# EAGLE board Breakout Board for USB microB-Panel (EAGLE 6.5.0)
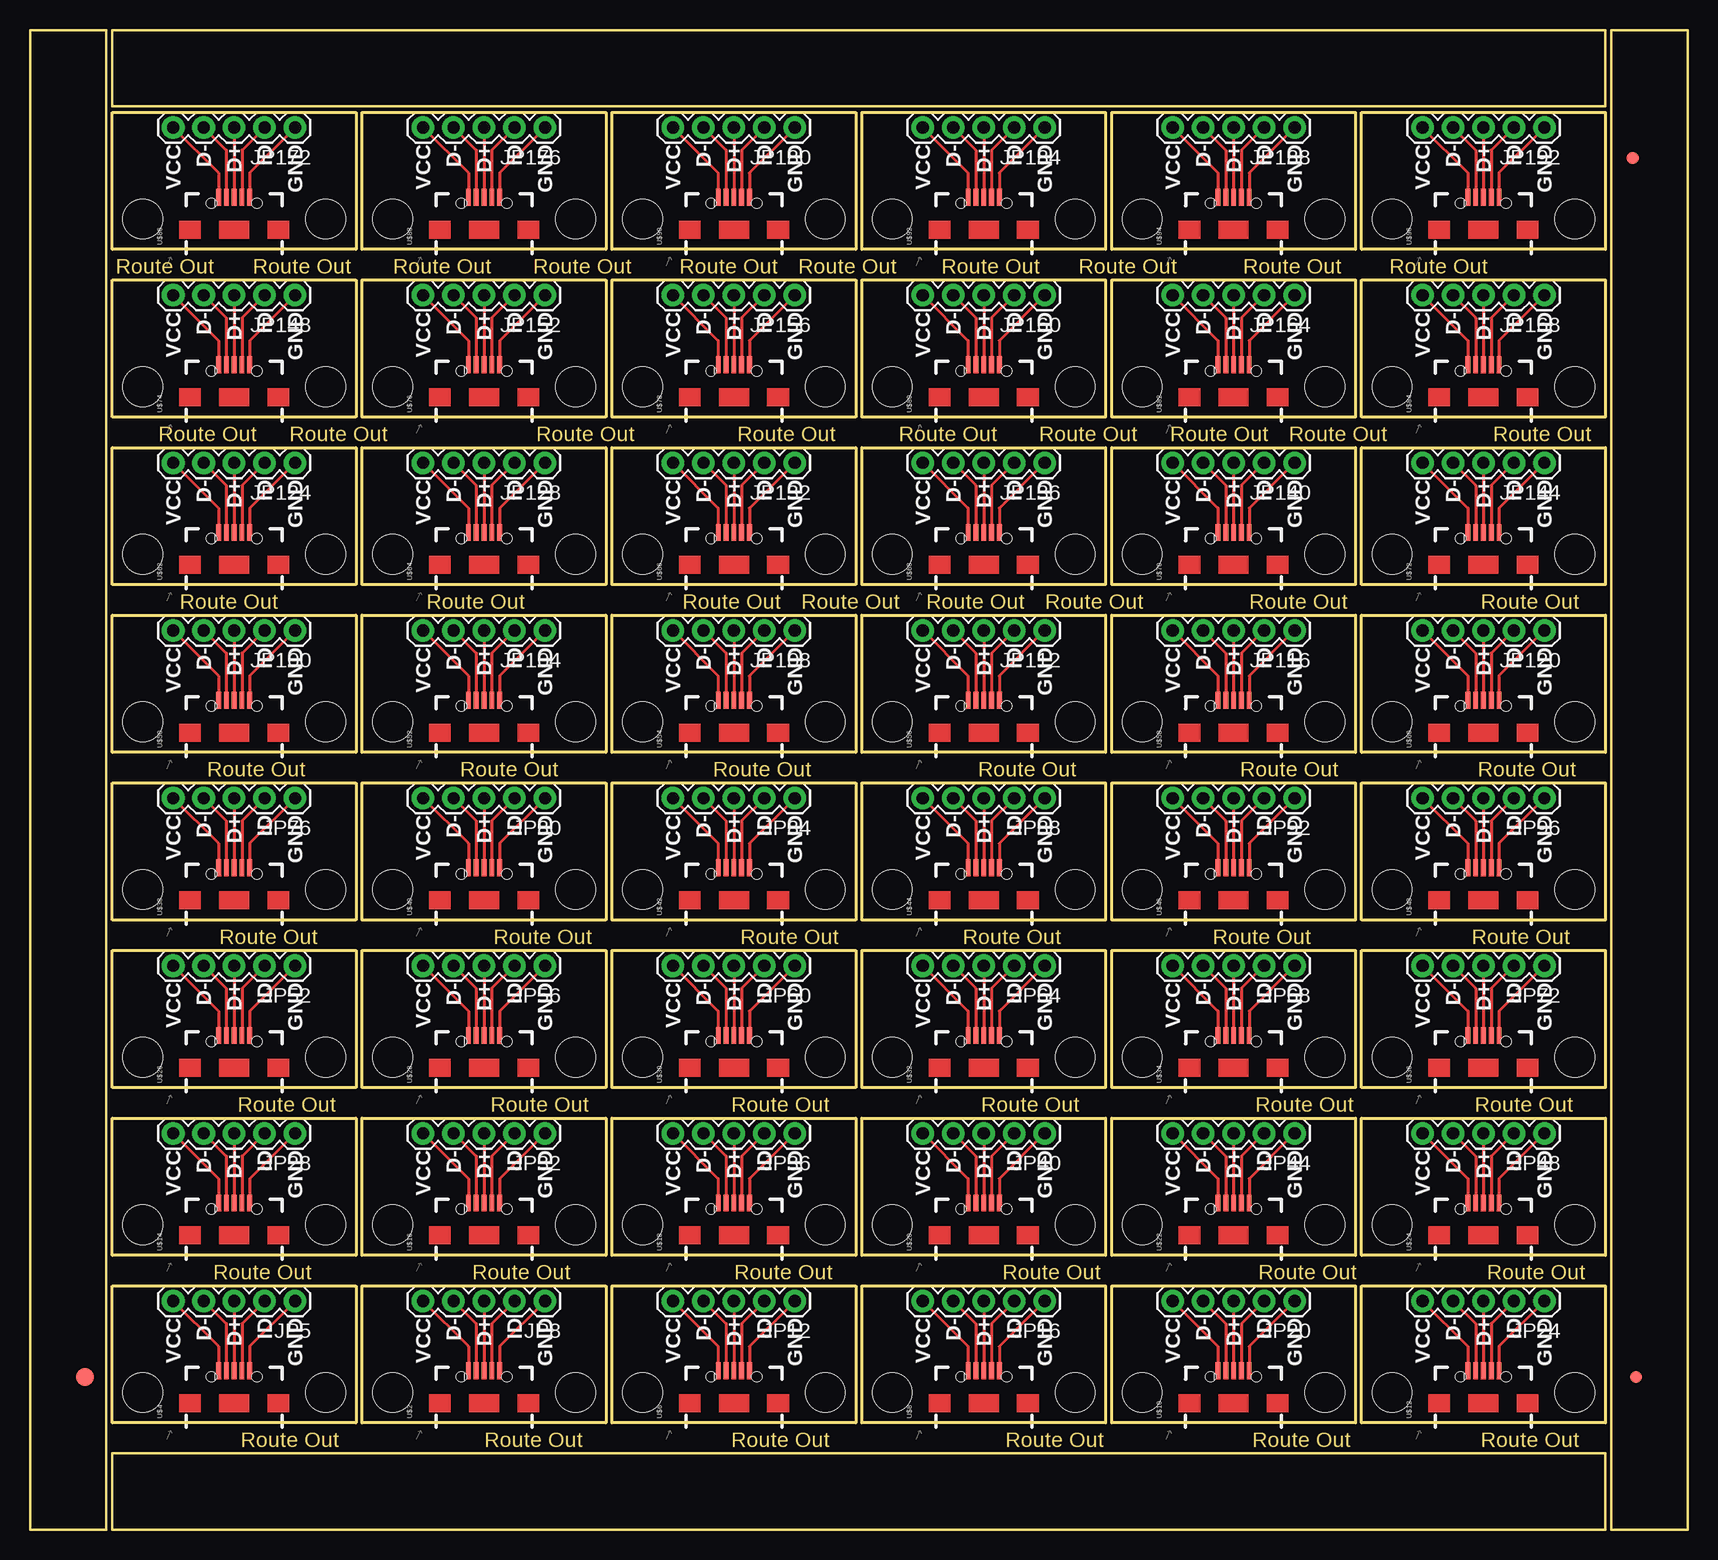
[diagram p0: board, top side]
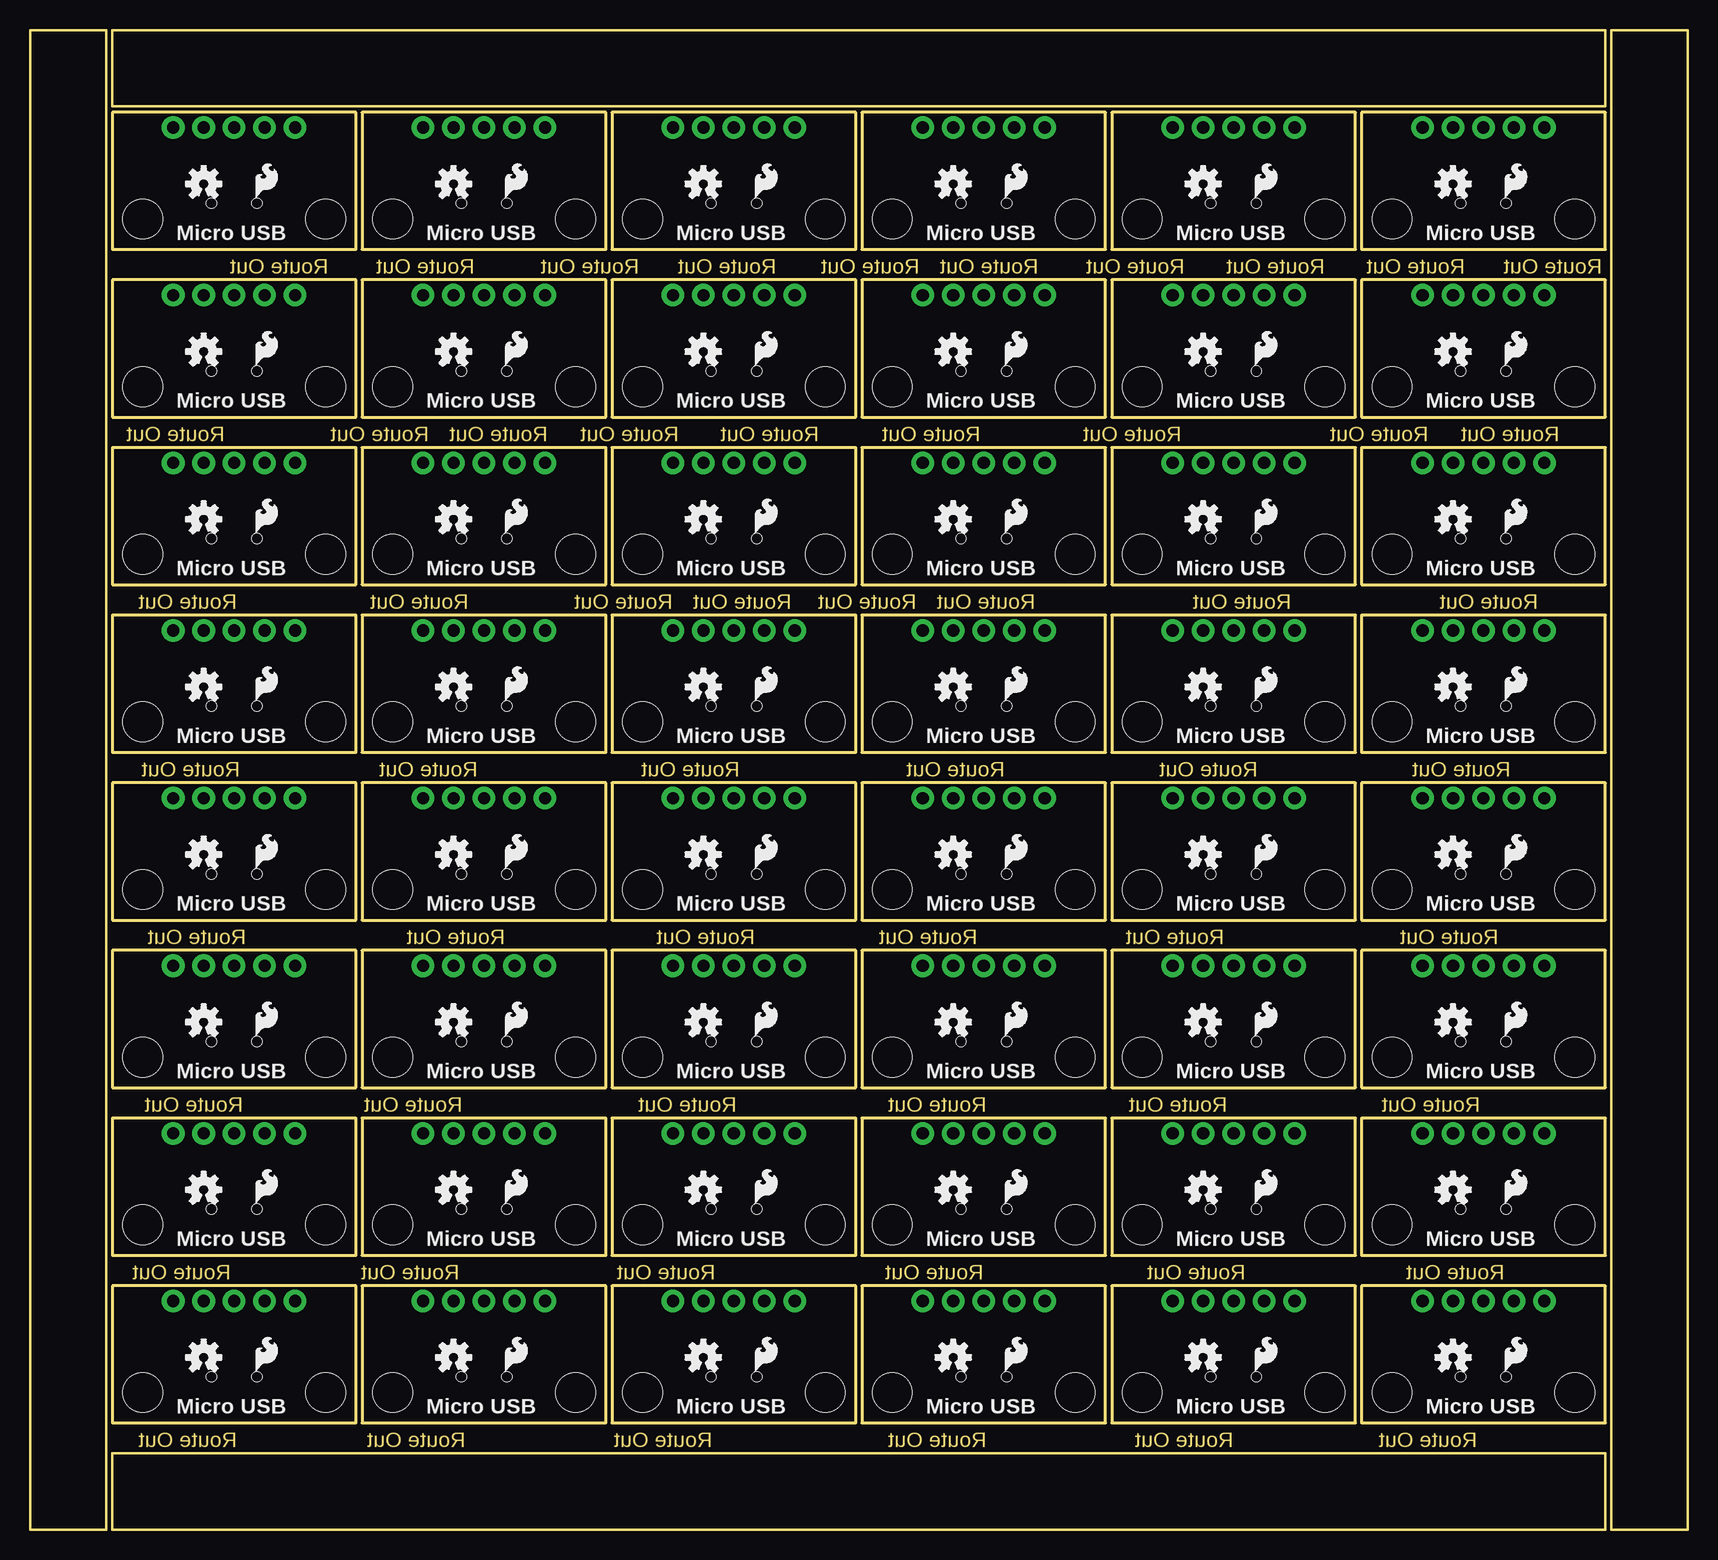
[diagram p1: board, bottom side, seen from below]

Size 138.18 x 124.97 mm. Coordinates in mm from the lower left corner, seen from the top.
Outline: 210 segments
Copper layers (1*16): Top 0.035mm / dielectric 1.5mm / Bottom 0.035mm
Design rules "default": minimum track width 8mil, minimum drill 20mil, track to track 8mil, track to pad 8mil, pad to pad 8mil, via to via 8mil, smd to smd 8mil, copper to edge 9mil, drill to drill 8mil, minimum pad ring 12mil, minimum via ring 10mil, stop-mask expansion 4mil, vias tented up to drill 20mil, thermal gap 10mil

## Footprints (pad centres in the part's own frame; a part is rotated, then mirrored left to right if it is on the bottom)
FIDUCIAL-1.5X3 = smd 1.5 x 1.5: 1 0,0
FIDUCIAL-1X2 = smd 1 x 1: 1 0,0
STAND-OFF = hole 3.302: 0,0
1X05 = drill 1.016 pad 1.88: 1 0,0; 2 2.54,0; 3 5.08,0; 4 7.62,0; 5 10.16,0
USB-AB-MICRO-SMD_V02_BOSS = smd 1.4 x 0.4: D+1 2.7,0; D-1 2.7,0.65; GND1 2.7,-1.3; ID1 2.7,-0.65; VBUS1 2.7,1.3 | hole 0.85: 2.2,1.9; 2.2,-1.9

## Placement (x,y rotation side)
E$1  [FIDUCIAL-1.5X3]  4.57,12.7 0 top
E$4  [FIDUCIAL-1X2]  133.86,12.7 0 top
E$5  [FIDUCIAL-1X2]  133.6,114.3 180 top
JP1  LOGO-SFESK  [SFE-LOGO-FLAME]  36.07,13.21 0 bottom
JP2  LOGO-SFESK  [SFE-LOGO-FLAME]  15.24,13.21 0 bottom
JP3  STAND-OFF  [STAND-OFF]  24.64,11.43 0 top
JP4  STAND-OFF  [STAND-OFF]  9.4,11.43 0 top
JP5  [1X05]  22.1,19.05 180 top
JP6  STAND-OFF  [STAND-OFF]  45.47,11.43 0 top
JP7  STAND-OFF  [STAND-OFF]  30.23,11.43 0 top
JP8  [1X05]  42.93,19.05 180 top
JP9  LOGO-SFESK  [SFE-LOGO-FLAME]  56.9,13.21 0 bottom
JP10  STAND-OFF  [STAND-OFF]  66.29,11.43 0 top
JP11  STAND-OFF  [STAND-OFF]  51.05,11.43 0 top
JP12  [1X05]  63.75,19.05 180 top
JP13  LOGO-SFESK  [SFE-LOGO-FLAME]  77.72,13.21 0 bottom
JP14  STAND-OFF  [STAND-OFF]  87.12,11.43 0 top
JP15  STAND-OFF  [STAND-OFF]  71.88,11.43 0 top
JP16  [1X05]  84.58,19.05 180 top
JP17  LOGO-SFESK  [SFE-LOGO-FLAME]  98.55,13.21 0 bottom
JP18  STAND-OFF  [STAND-OFF]  107.95,11.43 0 top
JP19  STAND-OFF  [STAND-OFF]  92.71,11.43 0 top
JP20  [1X05]  105.41,19.05 180 top
JP21  LOGO-SFESK  [SFE-LOGO-FLAME]  119.38,13.21 0 bottom
JP22  STAND-OFF  [STAND-OFF]  128.78,11.43 0 top
JP23  STAND-OFF  [STAND-OFF]  113.54,11.43 0 top
JP24  [1X05]  126.24,19.05 180 top
JP25  LOGO-SFESK  [SFE-LOGO-FLAME]  15.24,27.18 0 bottom
JP26  STAND-OFF  [STAND-OFF]  24.64,25.4 0 top
JP27  STAND-OFF  [STAND-OFF]  9.4,25.4 0 top
JP28  [1X05]  22.1,33.02 180 top
JP29  LOGO-SFESK  [SFE-LOGO-FLAME]  36.07,27.18 0 bottom
JP30  STAND-OFF  [STAND-OFF]  45.47,25.4 0 top
JP31  STAND-OFF  [STAND-OFF]  30.23,25.4 0 top
JP32  [1X05]  42.93,33.02 180 top
JP33  LOGO-SFESK  [SFE-LOGO-FLAME]  56.9,27.18 0 bottom
JP34  STAND-OFF  [STAND-OFF]  66.29,25.4 0 top
JP35  STAND-OFF  [STAND-OFF]  51.05,25.4 0 top
JP36  [1X05]  63.75,33.02 180 top
JP37  LOGO-SFESK  [SFE-LOGO-FLAME]  77.72,27.18 0 bottom
JP38  STAND-OFF  [STAND-OFF]  87.12,25.4 0 top
JP39  STAND-OFF  [STAND-OFF]  71.88,25.4 0 top
JP40  [1X05]  84.58,33.02 180 top
JP41  LOGO-SFESK  [SFE-LOGO-FLAME]  98.55,27.18 0 bottom
JP42  STAND-OFF  [STAND-OFF]  107.95,25.4 0 top
JP43  STAND-OFF  [STAND-OFF]  92.71,25.4 0 top
JP44  [1X05]  105.41,33.02 180 top
JP45  LOGO-SFESK  [SFE-LOGO-FLAME]  119.38,27.18 0 bottom
JP46  STAND-OFF  [STAND-OFF]  128.78,25.4 0 top
JP47  STAND-OFF  [STAND-OFF]  113.54,25.4 0 top
JP48  [1X05]  126.24,33.02 180 top
JP49  LOGO-SFESK  [SFE-LOGO-FLAME]  15.24,41.15 0 bottom
JP50  STAND-OFF  [STAND-OFF]  24.64,39.37 0 top
JP51  STAND-OFF  [STAND-OFF]  9.4,39.37 0 top
JP52  [1X05]  22.1,46.99 180 top
JP53  LOGO-SFESK  [SFE-LOGO-FLAME]  36.07,41.15 0 bottom
JP54  STAND-OFF  [STAND-OFF]  45.47,39.37 0 top
JP55  STAND-OFF  [STAND-OFF]  30.23,39.37 0 top
JP56  [1X05]  42.93,46.99 180 top
JP57  LOGO-SFESK  [SFE-LOGO-FLAME]  56.9,41.15 0 bottom
JP58  STAND-OFF  [STAND-OFF]  66.29,39.37 0 top
JP59  STAND-OFF  [STAND-OFF]  51.05,39.37 0 top
JP60  [1X05]  63.75,46.99 180 top
JP61  LOGO-SFESK  [SFE-LOGO-FLAME]  77.72,41.15 0 bottom
JP62  STAND-OFF  [STAND-OFF]  87.12,39.37 0 top
JP63  STAND-OFF  [STAND-OFF]  71.88,39.37 0 top
JP64  [1X05]  84.58,46.99 180 top
JP65  LOGO-SFESK  [SFE-LOGO-FLAME]  98.55,41.15 0 bottom
JP66  STAND-OFF  [STAND-OFF]  107.95,39.37 0 top
JP67  STAND-OFF  [STAND-OFF]  92.71,39.37 0 top
JP68  [1X05]  105.41,46.99 180 top
JP69  LOGO-SFESK  [SFE-LOGO-FLAME]  119.38,41.15 0 bottom
JP70  STAND-OFF  [STAND-OFF]  128.78,39.37 0 top
JP71  STAND-OFF  [STAND-OFF]  113.54,39.37 0 top
JP72  [1X05]  126.24,46.99 180 top
JP73  LOGO-SFESK  [SFE-LOGO-FLAME]  15.24,55.12 0 bottom
JP74  STAND-OFF  [STAND-OFF]  24.64,53.34 0 top
JP75  STAND-OFF  [STAND-OFF]  9.4,53.34 0 top
JP76  [1X05]  22.1,60.96 180 top
JP77  LOGO-SFESK  [SFE-LOGO-FLAME]  36.07,55.12 0 bottom
JP78  STAND-OFF  [STAND-OFF]  45.47,53.34 0 top
JP79  STAND-OFF  [STAND-OFF]  30.23,53.34 0 top
JP80  [1X05]  42.93,60.96 180 top
JP81  LOGO-SFESK  [SFE-LOGO-FLAME]  56.9,55.12 0 bottom
JP82  STAND-OFF  [STAND-OFF]  66.29,53.34 0 top
JP83  STAND-OFF  [STAND-OFF]  51.05,53.34 0 top
JP84  [1X05]  63.75,60.96 180 top
JP85  LOGO-SFESK  [SFE-LOGO-FLAME]  77.72,55.12 0 bottom
JP86  STAND-OFF  [STAND-OFF]  87.12,53.34 0 top
JP87  STAND-OFF  [STAND-OFF]  71.88,53.34 0 top
JP88  [1X05]  84.58,60.96 180 top
JP89  LOGO-SFESK  [SFE-LOGO-FLAME]  98.55,55.12 0 bottom
JP90  STAND-OFF  [STAND-OFF]  107.95,53.34 0 top
JP91  STAND-OFF  [STAND-OFF]  92.71,53.34 0 top
JP92  [1X05]  105.41,60.96 180 top
JP93  LOGO-SFESK  [SFE-LOGO-FLAME]  119.38,55.12 0 bottom
JP94  STAND-OFF  [STAND-OFF]  128.78,53.34 0 top
JP95  STAND-OFF  [STAND-OFF]  113.54,53.34 0 top
JP96  [1X05]  126.24,60.96 180 top
JP97  LOGO-SFESK  [SFE-LOGO-FLAME]  15.24,69.09 0 bottom
JP98  STAND-OFF  [STAND-OFF]  24.64,67.31 0 top
JP99  STAND-OFF  [STAND-OFF]  9.4,67.31 0 top
JP100  [1X05]  22.1,74.93 180 top
JP101  LOGO-SFESK  [SFE-LOGO-FLAME]  36.07,69.09 0 bottom
JP102  STAND-OFF  [STAND-OFF]  45.47,67.31 0 top
JP103  STAND-OFF  [STAND-OFF]  30.23,67.31 0 top
JP104  [1X05]  42.93,74.93 180 top
JP105  LOGO-SFESK  [SFE-LOGO-FLAME]  56.9,69.09 0 bottom
JP106  STAND-OFF  [STAND-OFF]  66.29,67.31 0 top
JP107  STAND-OFF  [STAND-OFF]  51.05,67.31 0 top
JP108  [1X05]  63.75,74.93 180 top
JP109  LOGO-SFESK  [SFE-LOGO-FLAME]  77.72,69.09 0 bottom
JP110  STAND-OFF  [STAND-OFF]  87.12,67.31 0 top
JP111  STAND-OFF  [STAND-OFF]  71.88,67.31 0 top
JP112  [1X05]  84.58,74.93 180 top
JP113  LOGO-SFESK  [SFE-LOGO-FLAME]  98.55,69.09 0 bottom
JP114  STAND-OFF  [STAND-OFF]  107.95,67.31 0 top
JP115  STAND-OFF  [STAND-OFF]  92.71,67.31 0 top
JP116  [1X05]  105.41,74.93 180 top
JP117  LOGO-SFESK  [SFE-LOGO-FLAME]  119.38,69.09 0 bottom
JP118  STAND-OFF  [STAND-OFF]  128.78,67.31 0 top
JP119  STAND-OFF  [STAND-OFF]  113.54,67.31 0 top
JP120  [1X05]  126.24,74.93 180 top
JP121  LOGO-SFESK  [SFE-LOGO-FLAME]  15.24,83.06 0 bottom
JP122  STAND-OFF  [STAND-OFF]  24.64,81.28 0 top
JP123  STAND-OFF  [STAND-OFF]  9.4,81.28 0 top
JP124  [1X05]  22.1,88.9 180 top
JP125  LOGO-SFESK  [SFE-LOGO-FLAME]  36.07,83.06 0 bottom
JP126  STAND-OFF  [STAND-OFF]  45.47,81.28 0 top
JP127  STAND-OFF  [STAND-OFF]  30.23,81.28 0 top
JP128  [1X05]  42.93,88.9 180 top
JP129  LOGO-SFESK  [SFE-LOGO-FLAME]  56.9,83.06 0 bottom
JP130  STAND-OFF  [STAND-OFF]  66.29,81.28 0 top
JP131  STAND-OFF  [STAND-OFF]  51.05,81.28 0 top
JP132  [1X05]  63.75,88.9 180 top
JP133  LOGO-SFESK  [SFE-LOGO-FLAME]  77.72,83.06 0 bottom
JP134  STAND-OFF  [STAND-OFF]  87.12,81.28 0 top
JP135  STAND-OFF  [STAND-OFF]  71.88,81.28 0 top
JP136  [1X05]  84.58,88.9 180 top
JP137  LOGO-SFESK  [SFE-LOGO-FLAME]  98.55,83.06 0 bottom
JP138  STAND-OFF  [STAND-OFF]  107.95,81.28 0 top
JP139  STAND-OFF  [STAND-OFF]  92.71,81.28 0 top
JP140  [1X05]  105.41,88.9 180 top
JP141  LOGO-SFESK  [SFE-LOGO-FLAME]  119.38,83.06 0 bottom
JP142  STAND-OFF  [STAND-OFF]  128.78,81.28 0 top
JP143  STAND-OFF  [STAND-OFF]  113.54,81.28 0 top
JP144  [1X05]  126.24,88.9 180 top
JP145  LOGO-SFESK  [SFE-LOGO-FLAME]  15.24,97.03 0 bottom
JP146  STAND-OFF  [STAND-OFF]  24.64,95.25 0 top
JP147  STAND-OFF  [STAND-OFF]  9.4,95.25 0 top
JP148  [1X05]  22.1,102.87 180 top
JP149  LOGO-SFESK  [SFE-LOGO-FLAME]  36.07,97.03 0 bottom
JP150  STAND-OFF  [STAND-OFF]  45.47,95.25 0 top
JP151  STAND-OFF  [STAND-OFF]  30.23,95.25 0 top
JP152  [1X05]  42.93,102.87 180 top
JP153  LOGO-SFESK  [SFE-LOGO-FLAME]  56.9,97.03 0 bottom
JP154  STAND-OFF  [STAND-OFF]  66.29,95.25 0 top
JP155  STAND-OFF  [STAND-OFF]  51.05,95.25 0 top
JP156  [1X05]  63.75,102.87 180 top
JP157  LOGO-SFESK  [SFE-LOGO-FLAME]  77.72,97.03 0 bottom
JP158  STAND-OFF  [STAND-OFF]  87.12,95.25 0 top
JP159  STAND-OFF  [STAND-OFF]  71.88,95.25 0 top
JP160  [1X05]  84.58,102.87 180 top
JP161  LOGO-SFESK  [SFE-LOGO-FLAME]  98.55,97.03 0 bottom
JP162  STAND-OFF  [STAND-OFF]  107.95,95.25 0 top
JP163  STAND-OFF  [STAND-OFF]  92.71,95.25 0 top
JP164  [1X05]  105.41,102.87 180 top
JP165  LOGO-SFESK  [SFE-LOGO-FLAME]  119.38,97.03 0 bottom
JP166  STAND-OFF  [STAND-OFF]  128.78,95.25 0 top
JP167  STAND-OFF  [STAND-OFF]  113.54,95.25 0 top
JP168  [1X05]  126.24,102.87 180 top
JP169  LOGO-SFESK  [SFE-LOGO-FLAME]  15.24,111 0 bottom
JP170  STAND-OFF  [STAND-OFF]  24.64,109.22 0 top
JP171  STAND-OFF  [STAND-OFF]  9.4,109.22 0 top
JP172  [1X05]  22.1,116.84 180 top
JP173  LOGO-SFESK  [SFE-LOGO-FLAME]  36.07,111 0 bottom
JP174  STAND-OFF  [STAND-OFF]  45.47,109.22 0 top
JP175  STAND-OFF  [STAND-OFF]  30.23,109.22 0 top
JP176  [1X05]  42.93,116.84 180 top
JP177  LOGO-SFESK  [SFE-LOGO-FLAME]  56.9,111 0 bottom
JP178  STAND-OFF  [STAND-OFF]  66.29,109.22 0 top
JP179  STAND-OFF  [STAND-OFF]  51.05,109.22 0 top
JP180  [1X05]  63.75,116.84 180 top
JP181  LOGO-SFESK  [SFE-LOGO-FLAME]  77.72,111 0 bottom
JP182  STAND-OFF  [STAND-OFF]  87.12,109.22 0 top
JP183  STAND-OFF  [STAND-OFF]  71.88,109.22 0 top
JP184  [1X05]  84.58,116.84 180 top
JP185  LOGO-SFESK  [SFE-LOGO-FLAME]  98.55,111 0 bottom
JP186  STAND-OFF  [STAND-OFF]  107.95,109.22 0 top
JP187  STAND-OFF  [STAND-OFF]  92.71,109.22 0 top
JP188  [1X05]  105.41,116.84 180 top
JP189  LOGO-SFESK  [SFE-LOGO-FLAME]  119.38,111 0 bottom
JP190  STAND-OFF  [STAND-OFF]  128.78,109.22 0 top
JP191  STAND-OFF  [STAND-OFF]  113.54,109.22 0 top
JP192  [1X05]  126.24,116.84 180 top
U$1  OSHW-LOGOS  [OSHW-LOGO-S]  40.39,14.35 0 bottom
U$2  [USB-AB-MICRO-SMD_V02_BOSS]  37.85,10.54 90 top
U$3  OSHW-LOGOS  [OSHW-LOGO-S]  19.56,14.35 0 bottom
U$4  [USB-AB-MICRO-SMD_V02_BOSS]  17.02,10.54 90 top
U$5  OSHW-LOGOS  [OSHW-LOGO-S]  61.21,14.35 0 bottom
U$6  [USB-AB-MICRO-SMD_V02_BOSS]  58.67,10.54 90 top
U$7  OSHW-LOGOS  [OSHW-LOGO-S]  82.04,14.35 0 bottom
U$8  [USB-AB-MICRO-SMD_V02_BOSS]  79.5,10.54 90 top
U$9  OSHW-LOGOS  [OSHW-LOGO-S]  102.87,14.35 0 bottom
U$10  [USB-AB-MICRO-SMD_V02_BOSS]  100.33,10.54 90 top
U$11  OSHW-LOGOS  [OSHW-LOGO-S]  123.7,14.35 0 bottom
U$12  [USB-AB-MICRO-SMD_V02_BOSS]  121.16,10.54 90 top
U$13  OSHW-LOGOS  [OSHW-LOGO-S]  19.56,28.32 0 bottom
U$14  [USB-AB-MICRO-SMD_V02_BOSS]  17.02,24.51 90 top
U$15  OSHW-LOGOS  [OSHW-LOGO-S]  40.39,28.32 0 bottom
U$16  [USB-AB-MICRO-SMD_V02_BOSS]  37.85,24.51 90 top
U$17  OSHW-LOGOS  [OSHW-LOGO-S]  61.21,28.32 0 bottom
U$18  [USB-AB-MICRO-SMD_V02_BOSS]  58.67,24.51 90 top
U$19  OSHW-LOGOS  [OSHW-LOGO-S]  82.04,28.32 0 bottom
U$20  [USB-AB-MICRO-SMD_V02_BOSS]  79.5,24.51 90 top
U$21  OSHW-LOGOS  [OSHW-LOGO-S]  102.87,28.32 0 bottom
U$22  [USB-AB-MICRO-SMD_V02_BOSS]  100.33,24.51 90 top
U$23  OSHW-LOGOS  [OSHW-LOGO-S]  123.7,28.32 0 bottom
U$24  [USB-AB-MICRO-SMD_V02_BOSS]  121.16,24.51 90 top
U$25  OSHW-LOGOS  [OSHW-LOGO-S]  19.56,42.29 0 bottom
U$26  [USB-AB-MICRO-SMD_V02_BOSS]  17.02,38.48 90 top
U$27  OSHW-LOGOS  [OSHW-LOGO-S]  40.39,42.29 0 bottom
U$28  [USB-AB-MICRO-SMD_V02_BOSS]  37.85,38.48 90 top
U$29  OSHW-LOGOS  [OSHW-LOGO-S]  61.21,42.29 0 bottom
U$30  [USB-AB-MICRO-SMD_V02_BOSS]  58.67,38.48 90 top
U$31  OSHW-LOGOS  [OSHW-LOGO-S]  82.04,42.29 0 bottom
U$32  [USB-AB-MICRO-SMD_V02_BOSS]  79.5,38.48 90 top
U$33  OSHW-LOGOS  [OSHW-LOGO-S]  102.87,42.29 0 bottom
U$34  [USB-AB-MICRO-SMD_V02_BOSS]  100.33,38.48 90 top
U$35  OSHW-LOGOS  [OSHW-LOGO-S]  123.7,42.29 0 bottom
U$36  [USB-AB-MICRO-SMD_V02_BOSS]  121.16,38.48 90 top
U$37  OSHW-LOGOS  [OSHW-LOGO-S]  19.56,56.26 0 bottom
U$38  [USB-AB-MICRO-SMD_V02_BOSS]  17.02,52.45 90 top
U$39  OSHW-LOGOS  [OSHW-LOGO-S]  40.39,56.26 0 bottom
U$40  [USB-AB-MICRO-SMD_V02_BOSS]  37.85,52.45 90 top
U$41  OSHW-LOGOS  [OSHW-LOGO-S]  61.21,56.26 0 bottom
U$42  [USB-AB-MICRO-SMD_V02_BOSS]  58.67,52.45 90 top
U$43  OSHW-LOGOS  [OSHW-LOGO-S]  82.04,56.26 0 bottom
U$44  [USB-AB-MICRO-SMD_V02_BOSS]  79.5,52.45 90 top
U$45  OSHW-LOGOS  [OSHW-LOGO-S]  102.87,56.26 0 bottom
U$46  [USB-AB-MICRO-SMD_V02_BOSS]  100.33,52.45 90 top
U$47  OSHW-LOGOS  [OSHW-LOGO-S]  123.7,56.26 0 bottom
U$48  [USB-AB-MICRO-SMD_V02_BOSS]  121.16,52.45 90 top
U$49  OSHW-LOGOS  [OSHW-LOGO-S]  19.56,70.23 0 bottom
U$50  [USB-AB-MICRO-SMD_V02_BOSS]  17.02,66.42 90 top
U$51  OSHW-LOGOS  [OSHW-LOGO-S]  40.39,70.23 0 bottom
U$52  [USB-AB-MICRO-SMD_V02_BOSS]  37.85,66.42 90 top
U$53  OSHW-LOGOS  [OSHW-LOGO-S]  61.21,70.23 0 bottom
U$54  [USB-AB-MICRO-SMD_V02_BOSS]  58.67,66.42 90 top
U$55  OSHW-LOGOS  [OSHW-LOGO-S]  82.04,70.23 0 bottom
U$56  [USB-AB-MICRO-SMD_V02_BOSS]  79.5,66.42 90 top
U$57  OSHW-LOGOS  [OSHW-LOGO-S]  102.87,70.23 0 bottom
U$58  [USB-AB-MICRO-SMD_V02_BOSS]  100.33,66.42 90 top
U$59  OSHW-LOGOS  [OSHW-LOGO-S]  123.7,70.23 0 bottom
U$60  [USB-AB-MICRO-SMD_V02_BOSS]  121.16,66.42 90 top
U$61  OSHW-LOGOS  [OSHW-LOGO-S]  19.56,84.2 0 bottom
U$62  [USB-AB-MICRO-SMD_V02_BOSS]  17.02,80.39 90 top
U$63  OSHW-LOGOS  [OSHW-LOGO-S]  40.39,84.2 0 bottom
U$64  [USB-AB-MICRO-SMD_V02_BOSS]  37.85,80.39 90 top
U$65  OSHW-LOGOS  [OSHW-LOGO-S]  61.21,84.2 0 bottom
U$66  [USB-AB-MICRO-SMD_V02_BOSS]  58.67,80.39 90 top
U$67  OSHW-LOGOS  [OSHW-LOGO-S]  82.04,84.2 0 bottom
U$68  [USB-AB-MICRO-SMD_V02_BOSS]  79.5,80.39 90 top
U$69  OSHW-LOGOS  [OSHW-LOGO-S]  102.87,84.2 0 bottom
U$70  [USB-AB-MICRO-SMD_V02_BOSS]  100.33,80.39 90 top
U$71  OSHW-LOGOS  [OSHW-LOGO-S]  123.7,84.2 0 bottom
U$72  [USB-AB-MICRO-SMD_V02_BOSS]  121.16,80.39 90 top
U$73  OSHW-LOGOS  [OSHW-LOGO-S]  19.56,98.17 0 bottom
U$74  [USB-AB-MICRO-SMD_V02_BOSS]  17.02,94.36 90 top
U$75  OSHW-LOGOS  [OSHW-LOGO-S]  40.39,98.17 0 bottom
U$76  [USB-AB-MICRO-SMD_V02_BOSS]  37.85,94.36 90 top
U$77  OSHW-LOGOS  [OSHW-LOGO-S]  61.21,98.17 0 bottom
U$78  [USB-AB-MICRO-SMD_V02_BOSS]  58.67,94.36 90 top
U$79  OSHW-LOGOS  [OSHW-LOGO-S]  82.04,98.17 0 bottom
U$80  [USB-AB-MICRO-SMD_V02_BOSS]  79.5,94.36 90 top
U$81  OSHW-LOGOS  [OSHW-LOGO-S]  102.87,98.17 0 bottom
U$82  [USB-AB-MICRO-SMD_V02_BOSS]  100.33,94.36 90 top
U$83  OSHW-LOGOS  [OSHW-LOGO-S]  123.7,98.17 0 bottom
U$84  [USB-AB-MICRO-SMD_V02_BOSS]  121.16,94.36 90 top
U$85  OSHW-LOGOS  [OSHW-LOGO-S]  19.56,112.14 0 bottom
U$86  [USB-AB-MICRO-SMD_V02_BOSS]  17.02,108.33 90 top
U$87  OSHW-LOGOS  [OSHW-LOGO-S]  40.39,112.14 0 bottom
U$88  [USB-AB-MICRO-SMD_V02_BOSS]  37.85,108.33 90 top
U$89  OSHW-LOGOS  [OSHW-LOGO-S]  61.21,112.14 0 bottom
U$90  [USB-AB-MICRO-SMD_V02_BOSS]  58.67,108.33 90 top
U$91  OSHW-LOGOS  [OSHW-LOGO-S]  82.04,112.14 0 bottom
U$92  [USB-AB-MICRO-SMD_V02_BOSS]  79.5,108.33 90 top
U$93  OSHW-LOGOS  [OSHW-LOGO-S]  102.87,112.14 0 bottom
U$94  [USB-AB-MICRO-SMD_V02_BOSS]  100.33,108.33 90 top
U$95  OSHW-LOGOS  [OSHW-LOGO-S]  123.7,112.14 0 bottom
U$96  [USB-AB-MICRO-SMD_V02_BOSS]  121.16,108.33 90 top

## Library data of the parts
E$1 E$4 E$5 U$1 U$3 U$5 U$7 U$9 U$11 U$13 U$15 U$17 U$19 U$21 U$23 U$25 U$27 U$29 U$31 U$33 U$35 U$37 U$39 U$41 U$43 U$45 U$47 U$49 U$51 U$53 U$55 U$57 U$59 U$61 U$63 U$65 U$67 U$69 U$71 U$73 U$75 U$77 U$79 U$81 U$83 U$85 U$87 U$89 U$91 U$93 U$95 = SparkFun-Aesthetics
JP1-JP192 = SparkFun
U$2 U$4 U$6 U$8 U$10 U$12 U$14 U$16 U$18 U$20 U$22 U$24 U$26 U$28 U$30 U$32 U$34 U$36 U$38 U$40 U$42 U$44 U$46 U$48 U$50 U$52 U$54 U$56 U$58 U$60 U$62 U$64 U$66 U$68 U$70 U$72 U$74 U$76 U$78 U$80 U$82 U$84 U$86 U$88 U$90 U$92 U$94 U$96 = Testing

## Nets
D+: JP5.3 U$4.D+1
D+1: JP8.3 U$2.D+1
D+2: JP12.3 U$6.D+1
D+3: JP16.3 U$8.D+1
D+4: JP20.3 U$10.D+1
D+5: JP24.3 U$12.D+1
D+6: JP28.3 U$14.D+1
D+7: JP32.3 U$16.D+1
D+8: JP36.3 U$18.D+1
D+9: JP40.3 U$20.D+1
D+10: JP44.3 U$22.D+1
D+11: JP48.3 U$24.D+1
D+12: JP52.3 U$26.D+1
D+13: JP56.3 U$28.D+1
D+14: JP60.3 U$30.D+1
D+15: JP64.3 U$32.D+1
D+16: JP68.3 U$34.D+1
D+17: JP72.3 U$36.D+1
D+18: JP76.3 U$38.D+1
D+19: JP80.3 U$40.D+1
D+20: JP84.3 U$42.D+1
D+21: JP88.3 U$44.D+1
D+22: JP92.3 U$46.D+1
D+23: JP96.3 U$48.D+1
D+24: JP100.3 U$50.D+1
D+25: JP104.3 U$52.D+1
D+26: JP108.3 U$54.D+1
D+27: JP112.3 U$56.D+1
D+28: JP116.3 U$58.D+1
D+29: JP120.3 U$60.D+1
D+30: JP124.3 U$62.D+1
D+31: JP128.3 U$64.D+1
D+32: JP132.3 U$66.D+1
D+33: JP136.3 U$68.D+1
D+34: JP140.3 U$70.D+1
D+35: JP144.3 U$72.D+1
D+36: JP148.3 U$74.D+1
D+37: JP152.3 U$76.D+1
D+38: JP156.3 U$78.D+1
D+39: JP160.3 U$80.D+1
D+40: JP164.3 U$82.D+1
D+41: JP168.3 U$84.D+1
D+42: JP172.3 U$86.D+1
D+43: JP176.3 U$88.D+1
D+44: JP180.3 U$90.D+1
D+45: JP184.3 U$92.D+1
D+46: JP188.3 U$94.D+1
D+47: JP192.3 U$96.D+1
D-: JP5.4 U$4.D-1
D-1: JP8.4 U$2.D-1
D-2: JP12.4 U$6.D-1
D-3: JP16.4 U$8.D-1
D-4: JP20.4 U$10.D-1
D-5: JP24.4 U$12.D-1
D-6: JP28.4 U$14.D-1
D-7: JP32.4 U$16.D-1
D-8: JP36.4 U$18.D-1
D-9: JP40.4 U$20.D-1
D-10: JP44.4 U$22.D-1
D-11: JP48.4 U$24.D-1
D-12: JP52.4 U$26.D-1
D-13: JP56.4 U$28.D-1
D-14: JP60.4 U$30.D-1
D-15: JP64.4 U$32.D-1
D-16: JP68.4 U$34.D-1
D-17: JP72.4 U$36.D-1
D-18: JP76.4 U$38.D-1
D-19: JP80.4 U$40.D-1
D-20: JP84.4 U$42.D-1
D-21: JP88.4 U$44.D-1
D-22: JP92.4 U$46.D-1
D-23: JP96.4 U$48.D-1
D-24: JP100.4 U$50.D-1
D-25: JP104.4 U$52.D-1
D-26: JP108.4 U$54.D-1
D-27: JP112.4 U$56.D-1
D-28: JP116.4 U$58.D-1
D-29: JP120.4 U$60.D-1
D-30: JP124.4 U$62.D-1
D-31: JP128.4 U$64.D-1
D-32: JP132.4 U$66.D-1
D-33: JP136.4 U$68.D-1
D-34: JP140.4 U$70.D-1
D-35: JP144.4 U$72.D-1
D-36: JP148.4 U$74.D-1
D-37: JP152.4 U$76.D-1
D-38: JP156.4 U$78.D-1
D-39: JP160.4 U$80.D-1
D-40: JP164.4 U$82.D-1
D-41: JP168.4 U$84.D-1
D-42: JP172.4 U$86.D-1
D-43: JP176.4 U$88.D-1
D-44: JP180.4 U$90.D-1
D-45: JP184.4 U$92.D-1
D-46: JP188.4 U$94.D-1
D-47: JP192.4 U$96.D-1
GND: JP5.1 U$4.GND1
GND1: JP8.1 U$2.GND1
GND2: JP12.1 U$6.GND1
GND3: JP16.1 U$8.GND1
GND4: JP20.1 U$10.GND1
GND5: JP24.1 U$12.GND1
GND6: JP28.1 U$14.GND1
GND7: JP32.1 U$16.GND1
GND8: JP36.1 U$18.GND1
GND9: JP40.1 U$20.GND1
GND10: JP44.1 U$22.GND1
GND11: JP48.1 U$24.GND1
GND12: JP52.1 U$26.GND1
GND13: JP56.1 U$28.GND1
GND14: JP60.1 U$30.GND1
GND15: JP64.1 U$32.GND1
GND16: JP68.1 U$34.GND1
GND17: JP72.1 U$36.GND1
GND18: JP76.1 U$38.GND1
GND19: JP80.1 U$40.GND1
GND20: JP84.1 U$42.GND1
GND21: JP88.1 U$44.GND1
GND22: JP92.1 U$46.GND1
GND23: JP96.1 U$48.GND1
GND24: JP100.1 U$50.GND1
GND25: JP104.1 U$52.GND1
GND26: JP108.1 U$54.GND1
GND27: JP112.1 U$56.GND1
GND28: JP116.1 U$58.GND1
GND29: JP120.1 U$60.GND1
GND30: JP124.1 U$62.GND1
GND31: JP128.1 U$64.GND1
GND32: JP132.1 U$66.GND1
GND33: JP136.1 U$68.GND1
GND34: JP140.1 U$70.GND1
GND35: JP144.1 U$72.GND1
GND36: JP148.1 U$74.GND1
GND37: JP152.1 U$76.GND1
GND38: JP156.1 U$78.GND1
GND39: JP160.1 U$80.GND1
GND40: JP164.1 U$82.GND1
GND41: JP168.1 U$84.GND1
GND42: JP172.1 U$86.GND1
GND43: JP176.1 U$88.GND1
GND44: JP180.1 U$90.GND1
GND45: JP184.1 U$92.GND1
GND46: JP188.1 U$94.GND1
GND47: JP192.1 U$96.GND1
ID: JP5.2 U$4.ID1
ID1: JP8.2 U$2.ID1
ID2: JP12.2 U$6.ID1
ID3: JP16.2 U$8.ID1
ID4: JP20.2 U$10.ID1
ID5: JP24.2 U$12.ID1
ID6: JP28.2 U$14.ID1
ID7: JP32.2 U$16.ID1
ID8: JP36.2 U$18.ID1
ID9: JP40.2 U$20.ID1
ID10: JP44.2 U$22.ID1
ID11: JP48.2 U$24.ID1
ID12: JP52.2 U$26.ID1
ID13: JP56.2 U$28.ID1
ID14: JP60.2 U$30.ID1
ID15: JP64.2 U$32.ID1
ID16: JP68.2 U$34.ID1
ID17: JP72.2 U$36.ID1
ID18: JP76.2 U$38.ID1
ID19: JP80.2 U$40.ID1
ID20: JP84.2 U$42.ID1
ID21: JP88.2 U$44.ID1
ID22: JP92.2 U$46.ID1
ID23: JP96.2 U$48.ID1
ID24: JP100.2 U$50.ID1
ID25: JP104.2 U$52.ID1
ID26: JP108.2 U$54.ID1
ID27: JP112.2 U$56.ID1
ID28: JP116.2 U$58.ID1
ID29: JP120.2 U$60.ID1
ID30: JP124.2 U$62.ID1
ID31: JP128.2 U$64.ID1
ID32: JP132.2 U$66.ID1
ID33: JP136.2 U$68.ID1
ID34: JP140.2 U$70.ID1
ID35: JP144.2 U$72.ID1
ID36: JP148.2 U$74.ID1
ID37: JP152.2 U$76.ID1
ID38: JP156.2 U$78.ID1
ID39: JP160.2 U$80.ID1
ID40: JP164.2 U$82.ID1
ID41: JP168.2 U$84.ID1
ID42: JP172.2 U$86.ID1
ID43: JP176.2 U$88.ID1
ID44: JP180.2 U$90.ID1
ID45: JP184.2 U$92.ID1
ID46: JP188.2 U$94.ID1
ID47: JP192.2 U$96.ID1
VBUS: JP5.5 U$4.VBUS1
VBUS1: JP8.5 U$2.VBUS1
VBUS2: JP12.5 U$6.VBUS1
VBUS3: JP16.5 U$8.VBUS1
VBUS4: JP20.5 U$10.VBUS1
VBUS5: JP24.5 U$12.VBUS1
VBUS6: JP28.5 U$14.VBUS1
VBUS7: JP32.5 U$16.VBUS1
VBUS8: JP36.5 U$18.VBUS1
VBUS9: JP40.5 U$20.VBUS1
VBUS10: JP44.5 U$22.VBUS1
VBUS11: JP48.5 U$24.VBUS1
VBUS12: JP52.5 U$26.VBUS1
VBUS13: JP56.5 U$28.VBUS1
VBUS14: JP60.5 U$30.VBUS1
VBUS15: JP64.5 U$32.VBUS1
VBUS16: JP68.5 U$34.VBUS1
VBUS17: JP72.5 U$36.VBUS1
VBUS18: JP76.5 U$38.VBUS1
VBUS19: JP80.5 U$40.VBUS1
VBUS20: JP84.5 U$42.VBUS1
VBUS21: JP88.5 U$44.VBUS1
VBUS22: JP92.5 U$46.VBUS1
VBUS23: JP96.5 U$48.VBUS1
VBUS24: JP100.5 U$50.VBUS1
VBUS25: JP104.5 U$52.VBUS1
VBUS26: JP108.5 U$54.VBUS1
VBUS27: JP112.5 U$56.VBUS1
VBUS28: JP116.5 U$58.VBUS1
VBUS29: JP120.5 U$60.VBUS1
VBUS30: JP124.5 U$62.VBUS1
VBUS31: JP128.5 U$64.VBUS1
VBUS32: JP132.5 U$66.VBUS1
VBUS33: JP136.5 U$68.VBUS1
VBUS34: JP140.5 U$70.VBUS1
VBUS35: JP144.5 U$72.VBUS1
VBUS36: JP148.5 U$74.VBUS1
VBUS37: JP152.5 U$76.VBUS1
VBUS38: JP156.5 U$78.VBUS1
VBUS39: JP160.5 U$80.VBUS1
VBUS40: JP164.5 U$82.VBUS1
VBUS41: JP168.5 U$84.VBUS1
VBUS42: JP172.5 U$86.VBUS1
VBUS43: JP176.5 U$88.VBUS1
VBUS44: JP180.5 U$90.VBUS1
VBUS45: JP184.5 U$92.VBUS1
VBUS46: JP188.5 U$94.VBUS1
VBUS47: JP192.5 U$96.VBUS1

## Tracks (layer width: path | path; a pad name or v marks a point on that pad's centre or on a via)
D+
  Top 0.254: JP5.3 U$4.D+1
D+1
  Top 0.254: JP8.3 U$2.D+1
D+2
  Top 0.254: JP12.3 U$6.D+1
D+3
  Top 0.254: JP16.3 U$8.D+1
D+4
  Top 0.254: JP20.3 U$10.D+1
D+5
  Top 0.254: JP24.3 U$12.D+1
D+6
  Top 0.254: JP28.3 U$14.D+1
D+7
  Top 0.254: JP32.3 U$16.D+1
D+8
  Top 0.254: JP36.3 U$18.D+1
D+9
  Top 0.254: JP40.3 U$20.D+1
D+10
  Top 0.254: JP44.3 U$22.D+1
D+11
  Top 0.254: JP48.3 U$24.D+1
D+12
  Top 0.254: JP52.3 U$26.D+1
D+13
  Top 0.254: JP56.3 U$28.D+1
D+14
  Top 0.254: JP60.3 U$30.D+1
D+15
  Top 0.254: JP64.3 U$32.D+1
D+16
  Top 0.254: JP68.3 U$34.D+1
D+17
  Top 0.254: JP72.3 U$36.D+1
D+18
  Top 0.254: JP76.3 U$38.D+1
D+19
  Top 0.254: JP80.3 U$40.D+1
D+20
  Top 0.254: JP84.3 U$42.D+1
D+21
  Top 0.254: JP88.3 U$44.D+1
D+22
  Top 0.254: JP92.3 U$46.D+1
D+23
  Top 0.254: JP96.3 U$48.D+1
D+24
  Top 0.254: JP100.3 U$50.D+1
D+25
  Top 0.254: JP104.3 U$52.D+1
D+26
  Top 0.254: JP108.3 U$54.D+1
D+27
  Top 0.254: JP112.3 U$56.D+1
D+28
  Top 0.254: JP116.3 U$58.D+1
D+29
  Top 0.254: JP120.3 U$60.D+1
D+30
  Top 0.254: JP124.3 U$62.D+1
D+31
  Top 0.254: JP128.3 U$64.D+1
D+32
  Top 0.254: JP132.3 U$66.D+1
D+33
  Top 0.254: JP136.3 U$68.D+1
D+34
  Top 0.254: JP140.3 U$70.D+1
D+35
  Top 0.254: JP144.3 U$72.D+1
D+36
  Top 0.254: JP148.3 U$74.D+1
D+37
  Top 0.254: JP152.3 U$76.D+1
D+38
  Top 0.254: JP156.3 U$78.D+1
D+39
  Top 0.254: JP160.3 U$80.D+1
D+40
  Top 0.254: JP164.3 U$82.D+1
D+41
  Top 0.254: JP168.3 U$84.D+1
D+42
  Top 0.254: JP172.3 U$86.D+1
D+43
  Top 0.254: JP176.3 U$88.D+1
D+44
  Top 0.254: JP180.3 U$90.D+1
D+45
  Top 0.254: JP184.3 U$92.D+1
D+46
  Top 0.254: JP188.3 U$94.D+1
D+47
  Top 0.254: JP192.3 U$96.D+1
D-
  Top 0.254: JP5.4 16.37,17.16 U$4.D-1
D-1
  Top 0.254: JP8.4 37.2,17.16 U$2.D-1
D-2
  Top 0.254: JP12.4 58.02,17.16 U$6.D-1
D-3
  Top 0.254: JP16.4 78.85,17.16 U$8.D-1
D-4
  Top 0.254: JP20.4 99.68,17.16 U$10.D-1
D-5
  Top 0.254: JP24.4 120.51,17.16 U$12.D-1
D-6
  Top 0.254: JP28.4 16.37,31.13 U$14.D-1
D-7
  Top 0.254: JP32.4 37.2,31.13 U$16.D-1
D-8
  Top 0.254: JP36.4 58.02,31.13 U$18.D-1
D-9
  Top 0.254: JP40.4 78.85,31.13 U$20.D-1
D-10
  Top 0.254: JP44.4 99.68,31.13 U$22.D-1
D-11
  Top 0.254: JP48.4 120.51,31.13 U$24.D-1
D-12
  Top 0.254: JP52.4 16.37,45.1 U$26.D-1
D-13
  Top 0.254: JP56.4 37.2,45.1 U$28.D-1
D-14
  Top 0.254: JP60.4 58.02,45.1 U$30.D-1
D-15
  Top 0.254: JP64.4 78.85,45.1 U$32.D-1
D-16
  Top 0.254: JP68.4 99.68,45.1 U$34.D-1
D-17
  Top 0.254: JP72.4 120.51,45.1 U$36.D-1
D-18
  Top 0.254: JP76.4 16.37,59.07 U$38.D-1
D-19
  Top 0.254: JP80.4 37.2,59.07 U$40.D-1
D-20
  Top 0.254: JP84.4 58.02,59.07 U$42.D-1
D-21
  Top 0.254: JP88.4 78.85,59.07 U$44.D-1
D-22
  Top 0.254: JP92.4 99.68,59.07 U$46.D-1
D-23
  Top 0.254: JP96.4 120.51,59.07 U$48.D-1
D-24
  Top 0.254: JP100.4 16.37,73.04 U$50.D-1
D-25
  Top 0.254: JP104.4 37.2,73.04 U$52.D-1
D-26
  Top 0.254: JP108.4 58.02,73.04 U$54.D-1
D-27
  Top 0.254: JP112.4 78.85,73.04 U$56.D-1
D-28
  Top 0.254: JP116.4 99.68,73.04 U$58.D-1
D-29
  Top 0.254: JP120.4 120.51,73.04 U$60.D-1
D-30
  Top 0.254: JP124.4 16.37,87.01 U$62.D-1
D-31
  Top 0.254: JP128.4 37.2,87.01 U$64.D-1
D-32
  Top 0.254: JP132.4 58.02,87.01 U$66.D-1
D-33
  Top 0.254: JP136.4 78.85,87.01 U$68.D-1
D-34
  Top 0.254: JP140.4 99.68,87.01 U$70.D-1
D-35
  Top 0.254: JP144.4 120.51,87.01 U$72.D-1
D-36
  Top 0.254: JP148.4 16.37,100.98 U$74.D-1
D-37
  Top 0.254: JP152.4 37.2,100.98 U$76.D-1
D-38
  Top 0.254: JP156.4 58.02,100.98 U$78.D-1
D-39
  Top 0.254: JP160.4 78.85,100.98 U$80.D-1
D-40
  Top 0.254: JP164.4 99.68,100.98 U$82.D-1
D-41
  Top 0.254: JP168.4 120.51,100.98 U$84.D-1
D-42
  Top 0.254: JP172.4 16.37,114.95 U$86.D-1
D-43
  Top 0.254: JP176.4 37.2,114.95 U$88.D-1
D-44
  Top 0.254: JP180.4 58.02,114.95 U$90.D-1
D-45
  Top 0.254: JP184.4 78.85,114.95 U$92.D-1
D-46
  Top 0.254: JP188.4 99.68,114.95 U$94.D-1
D-47
  Top 0.254: JP192.4 120.51,114.95 U$96.D-1
GND
  Top 0.254: JP5.1 18.32,15.27 U$4.GND1
GND1
  Top 0.254: JP8.1 39.15,15.27 U$2.GND1
GND2
  Top 0.254: JP12.1 59.97,15.27 U$6.GND1
GND3
  Top 0.254: JP16.1 80.8,15.27 U$8.GND1
GND4
  Top 0.254: JP20.1 101.63,15.27 U$10.GND1
GND5
  Top 0.254: JP24.1 122.46,15.27 U$12.GND1
GND6
  Top 0.254: JP28.1 18.32,29.24 U$14.GND1
GND7
  Top 0.254: JP32.1 39.15,29.24 U$16.GND1
GND8
  Top 0.254: JP36.1 59.97,29.24 U$18.GND1
GND9
  Top 0.254: JP40.1 80.8,29.24 U$20.GND1
GND10
  Top 0.254: JP44.1 101.63,29.24 U$22.GND1
GND11
  Top 0.254: JP48.1 122.46,29.24 U$24.GND1
GND12
  Top 0.254: JP52.1 18.32,43.21 U$26.GND1
GND13
  Top 0.254: JP56.1 39.15,43.21 U$28.GND1
GND14
  Top 0.254: JP60.1 59.97,43.21 U$30.GND1
GND15
  Top 0.254: JP64.1 80.8,43.21 U$32.GND1
GND16
  Top 0.254: JP68.1 101.63,43.21 U$34.GND1
GND17
  Top 0.254: JP72.1 122.46,43.21 U$36.GND1
GND18
  Top 0.254: JP76.1 18.32,57.18 U$38.GND1
GND19
  Top 0.254: JP80.1 39.15,57.18 U$40.GND1
GND20
  Top 0.254: JP84.1 59.97,57.18 U$42.GND1
GND21
  Top 0.254: JP88.1 80.8,57.18 U$44.GND1
GND22
  Top 0.254: JP92.1 101.63,57.18 U$46.GND1
GND23
  Top 0.254: JP96.1 122.46,57.18 U$48.GND1
GND24
  Top 0.254: JP100.1 18.32,71.15 U$50.GND1
GND25
  Top 0.254: JP104.1 39.15,71.15 U$52.GND1
GND26
  Top 0.254: JP108.1 59.97,71.15 U$54.GND1
GND27
  Top 0.254: JP112.1 80.8,71.15 U$56.GND1
GND28
  Top 0.254: JP116.1 101.63,71.15 U$58.GND1
GND29
  Top 0.254: JP120.1 122.46,71.15 U$60.GND1
GND30
  Top 0.254: JP124.1 18.32,85.12 U$62.GND1
GND31
  Top 0.254: JP128.1 39.15,85.12 U$64.GND1
GND32
  Top 0.254: JP132.1 59.97,85.12 U$66.GND1
GND33
  Top 0.254: JP136.1 80.8,85.12 U$68.GND1
GND34
  Top 0.254: JP140.1 101.63,85.12 U$70.GND1
GND35
  Top 0.254: JP144.1 122.46,85.12 U$72.GND1
GND36
  Top 0.254: JP148.1 18.32,99.09 U$74.GND1
GND37
  Top 0.254: JP152.1 39.15,99.09 U$76.GND1
GND38
  Top 0.254: JP156.1 59.97,99.09 U$78.GND1
GND39
  Top 0.254: JP160.1 80.8,99.09 U$80.GND1
GND40
  Top 0.254: JP164.1 101.63,99.09 U$82.GND1
GND41
  Top 0.254: JP168.1 122.46,99.09 U$84.GND1
GND42
  Top 0.254: JP172.1 18.32,113.06 U$86.GND1
GND43
  Top 0.254: JP176.1 39.15,113.06 U$88.GND1
GND44
  Top 0.254: JP180.1 59.97,113.06 U$90.GND1
GND45
  Top 0.254: JP184.1 80.8,113.06 U$92.GND1
GND46
  Top 0.254: JP188.1 101.63,113.06 U$94.GND1
GND47
  Top 0.254: JP192.1 122.46,113.06 U$96.GND1
ID
  Top 0.254: JP5.2 17.67,17.16 U$4.ID1
ID1
  Top 0.254: JP8.2 38.5,17.16 U$2.ID1
ID2
  Top 0.254: JP12.2 59.32,17.16 U$6.ID1
ID3
  Top 0.254: JP16.2 80.15,17.16 U$8.ID1
ID4
  Top 0.254: JP20.2 100.98,17.16 U$10.ID1
ID5
  Top 0.254: JP24.2 121.81,17.16 U$12.ID1
ID6
  Top 0.254: JP28.2 17.67,31.13 U$14.ID1
ID7
  Top 0.254: JP32.2 38.5,31.13 U$16.ID1
ID8
  Top 0.254: JP36.2 59.32,31.13 U$18.ID1
ID9
  Top 0.254: JP40.2 80.15,31.13 U$20.ID1
ID10
  Top 0.254: JP44.2 100.98,31.13 U$22.ID1
ID11
  Top 0.254: JP48.2 121.81,31.13 U$24.ID1
ID12
  Top 0.254: JP52.2 17.67,45.1 U$26.ID1
ID13
  Top 0.254: JP56.2 38.5,45.1 U$28.ID1
ID14
  Top 0.254: JP60.2 59.32,45.1 U$30.ID1
ID15
  Top 0.254: JP64.2 80.15,45.1 U$32.ID1
ID16
  Top 0.254: JP68.2 100.98,45.1 U$34.ID1
ID17
  Top 0.254: JP72.2 121.81,45.1 U$36.ID1
ID18
  Top 0.254: JP76.2 17.67,59.07 U$38.ID1
ID19
  Top 0.254: JP80.2 38.5,59.07 U$40.ID1
ID20
  Top 0.254: JP84.2 59.32,59.07 U$42.ID1
ID21
  Top 0.254: JP88.2 80.15,59.07 U$44.ID1
ID22
  Top 0.254: JP92.2 100.98,59.07 U$46.ID1
ID23
  Top 0.254: JP96.2 121.81,59.07 U$48.ID1
ID24
  Top 0.254: JP100.2 17.67,73.04 U$50.ID1
ID25
  Top 0.254: JP104.2 38.5,73.04 U$52.ID1
ID26
  Top 0.254: JP108.2 59.32,73.04 U$54.ID1
ID27
  Top 0.254: JP112.2 80.15,73.04 U$56.ID1
ID28
  Top 0.254: JP116.2 100.98,73.04 U$58.ID1
ID29
  Top 0.254: JP120.2 121.81,73.04 U$60.ID1
ID30
  Top 0.254: JP124.2 17.67,87.01 U$62.ID1
ID31
  Top 0.254: JP128.2 38.5,87.01 U$64.ID1
ID32
  Top 0.254: JP132.2 59.32,87.01 U$66.ID1
ID33
  Top 0.254: JP136.2 80.15,87.01 U$68.ID1
ID34
  Top 0.254: JP140.2 100.98,87.01 U$70.ID1
ID35
  Top 0.254: JP144.2 121.81,87.01 U$72.ID1
ID36
  Top 0.254: JP148.2 17.67,100.98 U$74.ID1
ID37
  Top 0.254: JP152.2 38.5,100.98 U$76.ID1
ID38
  Top 0.254: JP156.2 59.32,100.98 U$78.ID1
ID39
  Top 0.254: JP160.2 80.15,100.98 U$80.ID1
ID40
  Top 0.254: JP164.2 100.98,100.98 U$82.ID1
ID41
  Top 0.254: JP168.2 121.81,100.98 U$84.ID1
ID42
  Top 0.254: JP172.2 17.67,114.95 U$86.ID1
ID43
  Top 0.254: JP176.2 38.5,114.95 U$88.ID1
ID44
  Top 0.254: JP180.2 59.32,114.95 U$90.ID1
ID45
  Top 0.254: JP184.2 80.15,114.95 U$92.ID1
ID46
  Top 0.254: JP188.2 100.98,114.95 U$94.ID1
ID47
  Top 0.254: JP192.2 121.81,114.95 U$96.ID1
VBUS
  Top 0.254: JP5.5 15.72,15.27 U$4.VBUS1
VBUS1
  Top 0.254: JP8.5 36.55,15.27 U$2.VBUS1
VBUS2
  Top 0.254: JP12.5 57.37,15.27 U$6.VBUS1
VBUS3
  Top 0.254: JP16.5 78.2,15.27 U$8.VBUS1
VBUS4
  Top 0.254: JP20.5 99.03,15.27 U$10.VBUS1
VBUS5
  Top 0.254: JP24.5 119.86,15.27 U$12.VBUS1
VBUS6
  Top 0.254: JP28.5 15.72,29.24 U$14.VBUS1
VBUS7
  Top 0.254: JP32.5 36.55,29.24 U$16.VBUS1
VBUS8
  Top 0.254: JP36.5 57.37,29.24 U$18.VBUS1
VBUS9
  Top 0.254: JP40.5 78.2,29.24 U$20.VBUS1
VBUS10
  Top 0.254: JP44.5 99.03,29.24 U$22.VBUS1
VBUS11
  Top 0.254: JP48.5 119.86,29.24 U$24.VBUS1
VBUS12
  Top 0.254: JP52.5 15.72,43.21 U$26.VBUS1
VBUS13
  Top 0.254: JP56.5 36.55,43.21 U$28.VBUS1
VBUS14
  Top 0.254: JP60.5 57.37,43.21 U$30.VBUS1
VBUS15
  Top 0.254: JP64.5 78.2,43.21 U$32.VBUS1
VBUS16
  Top 0.254: JP68.5 99.03,43.21 U$34.VBUS1
VBUS17
  Top 0.254: JP72.5 119.86,43.21 U$36.VBUS1
VBUS18
  Top 0.254: JP76.5 15.72,57.18 U$38.VBUS1
VBUS19
  Top 0.254: JP80.5 36.55,57.18 U$40.VBUS1
VBUS20
  Top 0.254: JP84.5 57.37,57.18 U$42.VBUS1
VBUS21
  Top 0.254: JP88.5 78.2,57.18 U$44.VBUS1
VBUS22
  Top 0.254: JP92.5 99.03,57.18 U$46.VBUS1
VBUS23
  Top 0.254: JP96.5 119.86,57.18 U$48.VBUS1
VBUS24
  Top 0.254: JP100.5 15.72,71.15 U$50.VBUS1
VBUS25
  Top 0.254: JP104.5 36.55,71.15 U$52.VBUS1
VBUS26
  Top 0.254: JP108.5 57.37,71.15 U$54.VBUS1
VBUS27
  Top 0.254: JP112.5 78.2,71.15 U$56.VBUS1
VBUS28
  Top 0.254: JP116.5 99.03,71.15 U$58.VBUS1
VBUS29
  Top 0.254: JP120.5 119.86,71.15 U$60.VBUS1
VBUS30
  Top 0.254: JP124.5 15.72,85.12 U$62.VBUS1
VBUS31
  Top 0.254: JP128.5 36.55,85.12 U$64.VBUS1
VBUS32
  Top 0.254: JP132.5 57.37,85.12 U$66.VBUS1
VBUS33
  Top 0.254: JP136.5 78.2,85.12 U$68.VBUS1
VBUS34
  Top 0.254: JP140.5 99.03,85.12 U$70.VBUS1
VBUS35
  Top 0.254: JP144.5 119.86,85.12 U$72.VBUS1
VBUS36
  Top 0.254: JP148.5 15.72,99.09 U$74.VBUS1
VBUS37
  Top 0.254: JP152.5 36.55,99.09 U$76.VBUS1
VBUS38
  Top 0.254: JP156.5 57.37,99.09 U$78.VBUS1
VBUS39
  Top 0.254: JP160.5 78.2,99.09 U$80.VBUS1
VBUS40
  Top 0.254: JP164.5 99.03,99.09 U$82.VBUS1
VBUS41
  Top 0.254: JP168.5 119.86,99.09 U$84.VBUS1
VBUS42
  Top 0.254: JP172.5 15.72,113.06 U$86.VBUS1
VBUS43
  Top 0.254: JP176.5 36.55,113.06 U$88.VBUS1
VBUS44
  Top 0.254: JP180.5 57.37,113.06 U$90.VBUS1
VBUS45
  Top 0.254: JP184.5 78.2,113.06 U$92.VBUS1
VBUS46
  Top 0.254: JP188.5 99.03,113.06 U$94.VBUS1
VBUS47
  Top 0.254: JP192.5 119.86,113.06 U$96.VBUS1

## Text on the board
Dimension: Route Out | Route Out | Route Out | Route Out | Route Out | Route Out | Route Out | Route Out | Route Out | Route Out | Route Out | Route Out | Route Out | Route Out | Route Out | Route Out | Route Out | Route Out | Route Out | Route Out | Route Out | Route Out | Route Out | Route Out | Route Out | Route Out | Route Out | Route Out | Route Out | Route Out | Route Out | Route Out | Route Out | Route Out | Route Out | Route Out | Route Out | Route Out | Route Out | Route Out | Route Out | Route Out | Route Out | Route Out | Route Out | Route Out | Route Out | Route Out | Route Out | Route Out | Route Out | Route Out | Route Out | Route Out | Route Out | Route Out | Route Out
tPlace: VCC | D- | D+ | ID | GND | VCC | D- | D+ | ID | GND | VCC | D- | D+ | ID | GND | VCC | D- | D+ | ID | GND | VCC | D- | D+ | ID | GND | VCC | D- | D+ | ID | GND | VCC | D- | D+ | ID | GND | VCC | D- | D+ | ID | GND | VCC | D- | D+ | ID | GND | VCC | D- | D+ | ID | GND | VCC | D- | D+ | ID | GND | VCC | D- | D+ | ID | GND | VCC | D- | D+ | ID | GND | VCC | D- | D+ | ID | GND | VCC | D- | D+ | ID | GND | VCC | D- | D+ | ID | GND | VCC | D- | D+ | ID | GND | VCC | D- | D+ | ID | GND | VCC | D- | D+ | ID | GND | VCC | D- | D+ | ID | GND | VCC | D- | D+ | ID | GND | VCC | D- | D+ | ID | GND | VCC | D- | D+ | ID | GND | VCC | D- | D+ | ID | GND | VCC | D- | D+ | ID | GND | VCC | D- | D+ | ID | GND | VCC | D- | D+ | ID | GND | VCC | D- | D+ | ID | GND | VCC | D- | D+ | ID | GND | VCC | D- | D+ | ID | GND | VCC | D- | D+ | ID | GND | VCC | D- | D+ | ID | GND | VCC | D- | D+ | ID | GND | VCC | D- | D+ | ID | GND | VCC | D- | D+ | ID | GND | VCC | D- | D+ | ID | GND | VCC | D- | D+ | ID | GND | VCC | D- | D+ | ID | GND | VCC | D- | D+ | ID | GND | VCC | D- | D+ | ID | GND | VCC | D- | D+ | ID | GND | VCC | D- | D+ | ID | GND | VCC | D- | D+ | ID | GND | VCC | D- | D+ | ID | GND | VCC | D- | D+ | ID | GND | VCC | D- | D+ | ID | GND | VCC | D- | D+ | ID | GND | VCC | D- | D+ | ID | GND
bPlace: Micro USB | Micro USB | Micro USB | Micro USB | Micro USB | Micro USB | Micro USB | Micro USB | Micro USB | Micro USB | Micro USB | Micro USB | Micro USB | Micro USB | Micro USB | Micro USB | Micro USB | Micro USB | Micro USB | Micro USB | Micro USB | Micro USB | Micro USB | Micro USB | Micro USB | Micro USB | Micro USB | Micro USB | Micro USB | Micro USB | Micro USB | Micro USB | Micro USB | Micro USB | Micro USB | Micro USB | Micro USB | Micro USB | Micro USB | Micro USB | Micro USB | Micro USB | Micro USB | Micro USB | Micro USB | Micro USB | Micro USB | Micro USB